# Altium PCB DONGLE01.PcbDoc
Units mil, origin at the board's own origin, x right, y up, seen from the top; angles counter-clockwise.
Board outline 2207 x 654 mil, 2 copper layers (Top, Bottom), stack 41.756 mil thick; 46 components, 31 nets, 144 pads, 90 vias.
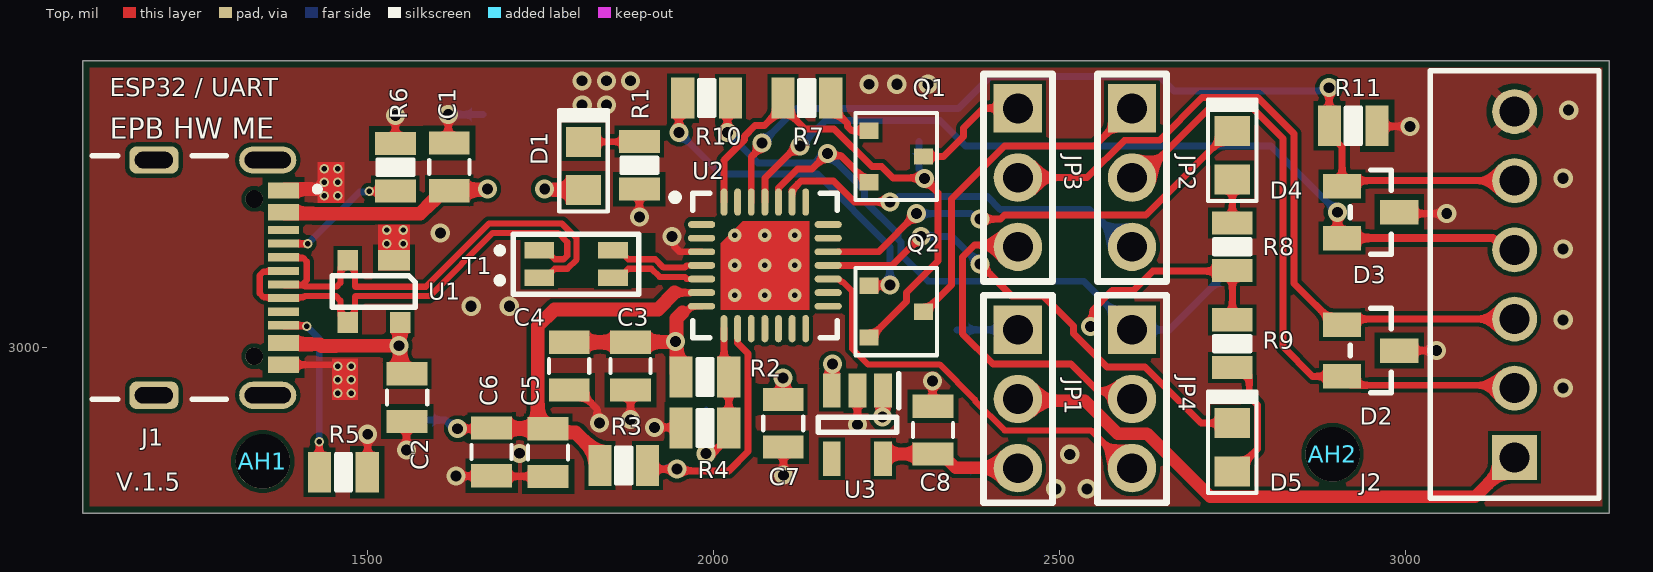
[diagram p0: Top view]
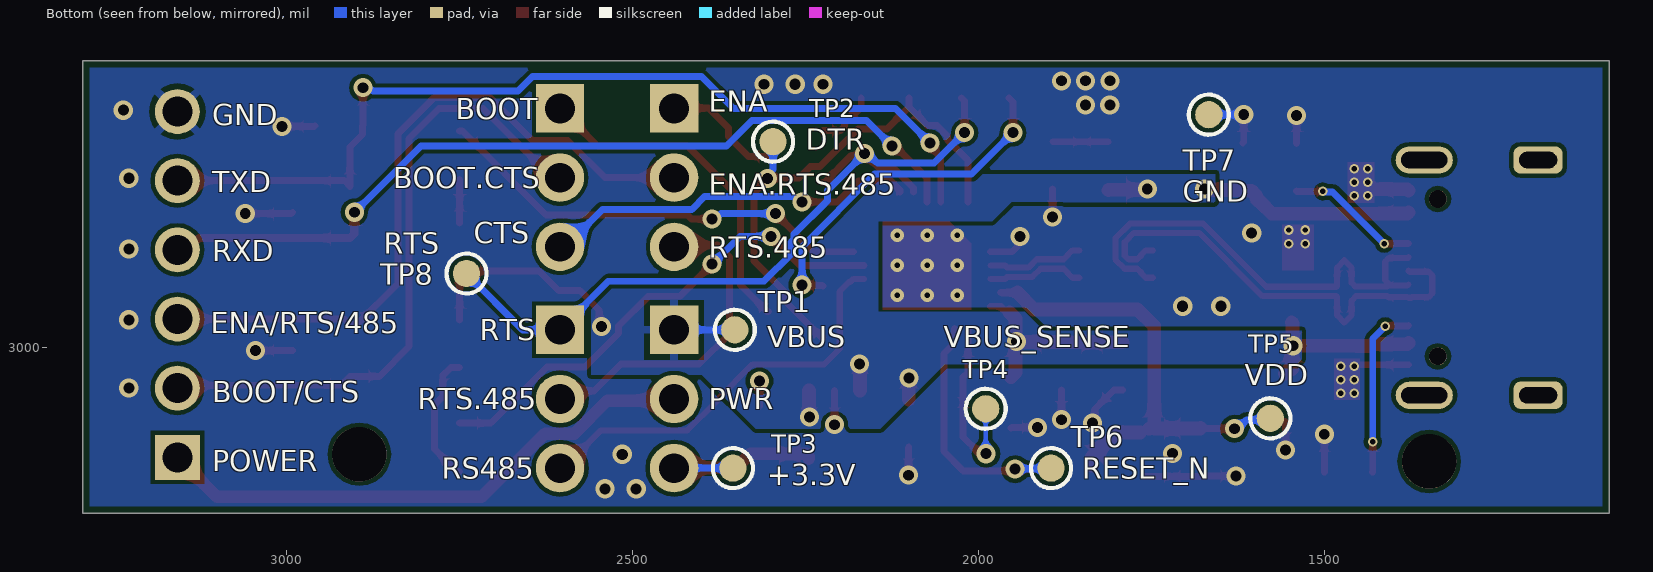
[diagram p1: Bottom view, seen from below]
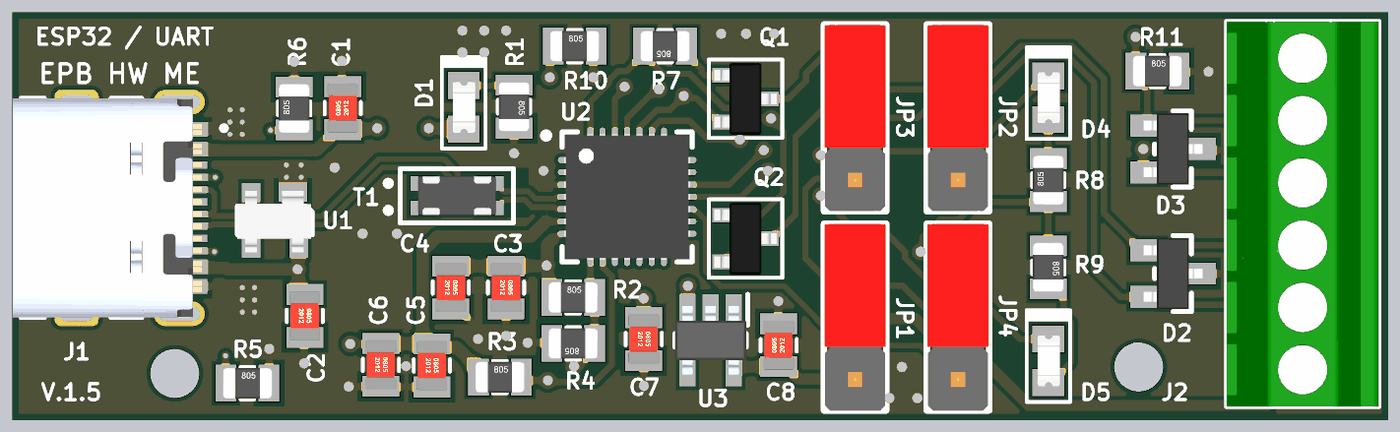
[diagram p2: 3D render of the assembled board from above, using the file's embedded part models]

## Layer stack, top to bottom
Top Solder: solder mask 1, SM-001, Dk 4
Top: signal copper 1.378
Dielectric 1: core 39, Core-042, Dk 4.6
Bottom: signal copper 1.378
Bottom Solder: solder mask 1, SM-001, Dk 4

## Board outline
1088,2760 1088,3414 3295,3414 3295,2760

## Design rules (kind name [scope] priority, off if disabled: settings)
BoardOutlineClearance [All] p1: gap=10 ignorepadtopadclearanceinfootprint=FALSE
Clearance [All vs not InAnyDifferentialPair] p1: gap=6 ignorepadtopadclearanceinfootprint=TRUE
DiffPairsRouting "Schematic Differential Pairs Routing_1" [InNetClass('USB')] p1: maxlimit=4.51 minlimit=4.51 mostfreqgap=4.51 toplayer_minwidth=9 toplayer_maxwidth=9 toplayer_prefwidth=9 bottomlayer_minwidth=9 bottomlayer_maxwidth=9 bottomlayer_prefwidth=9 impedanceprofiledriven=TRUE impedanceprofileid={0D77AD79-8F11-46E1-93D8-ED229D89D16F} impedanceprofilevalue=90.000000 maxuncoupledlength=500
DiffPairsRouting "Schematic Differential Pairs Routing" [InNetClass('USBi')] p2: maxlimit=4.51 minlimit=4.51 mostfreqgap=4.51 toplayer_minwidth=9 toplayer_maxwidth=9 toplayer_prefwidth=9 bottomlayer_minwidth=9 bottomlayer_maxwidth=9 bottomlayer_prefwidth=9 impedanceprofiledriven=TRUE impedanceprofileid={0D77AD79-8F11-46E1-93D8-ED229D89D16F} impedanceprofilevalue=90.000000 maxuncoupledlength=500
DiffPairsRouting [All] p3: maxlimit=4.51 minlimit=4.51 mostfreqgap=4.51 toplayer_minwidth=9 toplayer_maxwidth=9 toplayer_prefwidth=9 bottomlayer_minwidth=9 bottomlayer_maxwidth=9 bottomlayer_prefwidth=9 impedanceprofiledriven=TRUE impedanceprofileid={0D77AD79-8F11-46E1-93D8-ED229D89D16F} impedanceprofilevalue=90.000000 maxuncoupledlength=500
MinimumSolderMaskSliver [not InComponent('J1') and not InComponent('U2')] p1: minsoldermaskwidth=6
PolygonConnect [All] p1: thpad.connectstyle=Relief thpad.reliefconductorwidth=12 thpad.reliefentries=4 thpad.polygonreliefangle="90 Angle" thpad.airgapwidth=8 thpad.conductorbypadedge=TRUE thpad.mindistance=15 thpad.enablemindistance=FALSE smdpad.connectstyle=NoConnect smdpad.reliefconductorwidth=8 smdpad.reliefentries=4 smdpad.polygonreliefangle="90 Angle" smdpad.airgapwidth=8 via.connectstyle=Direct via.reliefconductorwidth=8 via.reliefentries=4 via.polygonreliefangle="90 Angle" via.airgapwidth=8
RoutingVias [All] p1: holewidth=15.75 width=27.56 viastyle="Through Hole" minholewidth=7.87 minwidth=13.78 maxholewidth=39.37 maxwidth=196.85
SMDEntry [All] p1: side=TRUE corner=TRUE anyangle=TRUE
SilkToSolderMaskClearance [IsPad] p1: minsilkscreentomaskgap=1 clearancetoexposedcopper=FALSE
SolderMaskExpansion Via [IsVia] p1: expansion=4 istentingtop=TRUE
SolderMaskExpansion Generic [All] p2: expansion=1 istentingtop=FALSE
SupplyNets "Schematic Supply Nets_3" [InNet('VDD')] p1: voltage=0.000
SupplyNets "Schematic Supply Nets_4" [InNet('+3.3V')] p2: voltage=0.000
SupplyNets "Schematic Supply Nets_2" [InNet('GND')] p3: voltage=0.000
SupplyNets "Schematic Supply Nets_1" [InNet('VBUS')] p4: voltage=0.000
UnRoutedNet [All] p1: checkbadconnections=TRUE
Width [All] p1: maxlimit=50 minlimit=3.94 preferedwidth=10
26 further rules are at their usual default settings.

## Classes and differential pairs
net class USB: DE_N DE_P
net class USBi: DI_N DI_P
differential pair DI: +DI_P -DI_N
differential pair DE: +DE_P -DE_N

## Components (designator, comment, footprint, x,y, rotation, side; value= is the part's Value field where it differs from the comment)
AH1 "Furo de Alinhamento" AH_2.0MMD 1348.43,2834.65 r0 top
AH2 "Furo de Alinhamento" AH_2.0MMD 2895,2845 r0 top
C1 "4,7uF" C0805 1617.94,3260.57 r180 top
C2 "4,7uF" C0805 1557,2927 r0 top
C3 "4,7uF" C0805 1879.92,2972.44 r0 top
C4 "0.1uF" C0805 1791.34,2972.44 r0 top
C5 "4,7uF" C0805 1760.83,2847.44 r0 top
C6 "0.1uF" C0805 1679.13,2848.43 r0 top
C7 "1uF" C0805 2100.79,2889.76 r0 top
C8 "2.2uF" C0805 2317.32,2879.92 r180 top
D1 "Blue Led 0805" "LED 0805" 1812.01,3261.81 r270 top
D2 "7V TVS" WE-TVS_SOT23-3L 2950,2995 r270 top
D3 "7V TVS" WE-TVS_SOT23-3L 2950,3195 r270 top
D4 "RED" "LED 0805" 2750,3277.15 r270 top
D5 "GREEN" "LED 0805" 2750,2855 r270 top
J1 "USB4105-GF-A-060" GCT_USB4105-GF-A-060 1190.94,3100.39 r270 top
J2 "MPT 0,5/ 6-2,54" 1725698 3158.11,2840.55 r90 top
JP1 "Header 3 Pin" JMP-3-PTH-180 2440,2925 r270 top
JP2 "Header 3 Pin" JMP-3-PTH-180 2605,3245 r270 top
JP3 "Header 3 Pin" JMP-3-PTH-180 2440,3245 r270 top
JP4 "Header 3 Pin" JMP-3-PTH-180 2605,2925 r270 top
Q1 "BSS64LT1G" SOT-23 2264.17,3275.59 r270 top
Q2 "BSS64LT1G" SOT-23 2264.17,3051.18 r270 top
R1 "180R" R0805#1 1892.72,3262.8 r0 top
R2 "22K1" R0805#1 1987.6,2956.69 r90 top
R3 "1K07" R0805#1 1870.08,2828.74 r90 top
R4 "47K5" R0805#1 1987.6,2882.87 r270 top
R5 "5K1" R0805#1 1465,2819 r90 top
R6 "5K1" R0805#1 1540,3260 r180 top
R7 "10K" R0805#1 2135,3360 r270 top
R8 "220R" R0805#2 2750,3145 r90 top
R9 "220R" R0805#2 2750,3005 r270 top
R10 "10K" R0805#1 1990,3360 r90 top
R11 "10K" R0805#2 2925,3320 r0 top
T1 "CMC 370MA 2LN 90OHM SMD AEC-Q200" 744232090 1801.18,3120.08 r0 top
TP1 "" TP 2352.24,3025 r180 bottom
TP2 "" TP 2297,3297 r180 bottom
TP3 "" TP 2355,2825 r180 bottom
TP4 "" TP 1989.5,2910.83 r180 bottom
TP5 "" TP 1578,2897 r180 bottom
TP6 "" TP 1895,2825 r180 bottom
TP7 "" TP 1667,3336 r180 bottom
TP8 "" TP 2740.16,3106.3 r180 bottom
U1 "USB ESD protection" SOT143-4 1509.04,3080.46 r270 top
U2 "CP2102N-A02-GQFN28R" "QFN50P500X500X80_HS-29N CP2102N" 2074.21,3118.11 r0 top
U3 "3.3V 600mA PMIC" SOT94P280X100-5N 2208.07,2887.8 r270 top

## Footprints (in the part's own frame and the unit in brackets; to place one, negate y for a bottom-side part, rotate by r counter-clockwise, add the part's x,y. Pads: shape width x height; smd on the part's side, far side on the other; paste and mask are expansions set on the pad)
1725698 [mm]
  rect 1.65x1.65 hole 1.1: 1(0,0)
  round 1.65 hole 1.1: 2(2.54,0) 3(5.08,0) 4(7.62,0) 5(10.16,0) 6(12.7,0)
  silkscreen extent -1.5,-3.1 14.2,3.1, body extent -1.5,-3.1 14.2,3.1, height 8.61
744232090 [mm] "WURTH EMI FILTER 1206"
  rect 1.1x0.6 smd: 1(-1.35,-0.5) 2(1.35,-0.5) 3(1.35,0.5) 4(-1.35,0.5)
  silkscreen extent -2.9,-1.11 2.3,1.1, body extent -1.6,-0.8 1.6,0.8, height 1.15
AH_2.0MMD [mm] "Alignment Hole M2"
  round 2 hole 2 unplated: 1(0,0)
C0805 [mm]
  rect 1.5x0.85 smd mask+0.05: 1(0,0.875) 2(0,-0.875)
  silkscreen extent -0.74,-0.25 0.74,0.25, body extent -0.62,-1 0.63,1, height 0.9
GCT_USB4105-GF-A-060 [mm]
  rect 0.6x1.15 smd: A1_B12(-3.2,4.755) A4_B9(-2.4,4.755) B1_A12(3.2,4.755) B4_A9(2.4,4.755)
  rect 0.3x1.15 smd: A5(-1.25,4.755) A6(-0.25,4.755) A7(0.25,4.755) A8(1.25,4.755) B5(1.75,4.755) B6(0.75,4.755) B7(-0.75,4.755) B8(-1.75,4.755)
  oval 1x2.1 hole 0.6 slot 1.7 at 90 deg: SH1(-4.32,4.18) SH2(4.32,4.18)
  rrect50% 1x1.8 hole 0.6 slot 1.4 at 90 deg: SH3(-4.32,0) SH4(4.32,0)
  round 0.65 hole 0.65 unplated: ""(-2.89,3.68) ""(2.89,3.68)
  silkscreen extent -4.47,-2.26 4.47,6.1, body extent -4.47,-2.6 4.47,5.11, height 3.31
JMP-3-PTH-180 [mil] "Jumper 3 pinos PTH 180º passo 2.54mm"
  rect 70x70 hole 43: 1(-100,0)
  round 70 hole 43: 2(0,0) 3(100,0)
  silkscreen extent -150,-50 150,50, body extent -150,-49 150,49, height 323
"LED 0805" [mm]
  rect 1.1x1.3 smd mask+0.051: A(0.889,0) K(-0.889,0)
  silkscreen extent -2.06,-0.89 1.68,0.89, body extent -1.03,-0.44 1.03,0.47, height 0.85
"QFN50P500X500X80_HS-29N CP2102N" [mm] "QFN, 28-Leads, Body 5,00x5,00mm, Pitch 0,50mm, Thermal Pad 3,25x3,25mm, IPC Medium Density"
  oval 1x0.25 smd: 1(-2.325,1.5) 2(-2.325,1) 3(-2.325,0.5) 4(-2.325,0) 5(-2.325,-0.5) 6(-2.325,-1) 7(-2.325,-1.5) 15(2.325,-1.5) 16(2.325,-1) 17(2.325,-0.5) 18(2.325,0) 19(2.325,0.5) 20(2.325,1) 21(2.325,1.5)
  oval 0.25x1 smd: 8(-1.5,-2.325) 9(-1,-2.325) 10(-0.5,-2.325) 11(0,-2.325) 12(0.5,-2.325) 13(1,-2.325) 14(1.5,-2.325) 22(1.5,2.325) 23(1,2.325) 24(0.5,2.325) 25(0,2.325) 26(-0.5,2.325) 27(-1,2.325) 28(-1.5,2.325)
  round 0.025 smd: 29(0,0)
  Top region: -1.625,-1.625 -1.625,0.813 -0.813,1.625 1.625,1.625 1.625,-1.625
  silkscreen extent -3.42,-2.65 2.65,2.65, body extent -2.55,-2.55 2.55,2.55, height 0.8
R0805#1 [mm]
  rect 1.5x0.85 smd mask+0.05: 1(0,0.875) 2(0,-0.875)
  silkscreen extent -0.66,-0.28 0.66,0.28, body extent -0.62,-1 0.63,1, height 0.78
R0805#2 [mm] "0805 Generic Chip Resistor"
  rect 0.85x1.5 smd mask+0.05: 1(-0.875,0) 2(0.875,0)
  silkscreen extent -0.28,-0.66 0.28,0.66, body extent -1,-0.62 1,0.63, height 0.78
SOT94P280X100-5N [mm]
  rect 1.25x0.65 smd: 1(-1.25,0.94) 2(-1.25,0) 3(-1.25,-0.94) 4(1.25,-0.94) 5(1.25,0.94)
  silkscreen extent -1.88,-1.45 0.28,1.51, body extent -1.4,-1.45 1.4,1.45, height 1
SOT143-4 [mil]
  rect 30x46 smd: 1(-45,29)
  rect 30x30 smd: 2(-45,-38) 3(45,-38) 4(45,38)
  silkscreen extent -23,-60 23,60, body extent -47,-60 51,58, height 41
SOT-23 [mm]
  rect 0.6x0.7 smd: 1(-0.95,-1) 2(0.95,-1) 3(0,1)
  silkscreen extent -1.6,-1.5 1.6,1.5, body extent -1.46,-1.27 1.46,1.27, height 0.95
TP [mm] "Test Point SMD 1mm"
  round 1 smd paste-0.457 mask+0.051: 1(0,0)
  silkscreen extent -0.74,-0.74 0.73,0.74
WE-TVS_SOT23-3L [mm]
  rect 0.9x1.4 smd: 1(-0.95,-1.05) 2(0.95,-1.05) 3(0,1.05)
  silkscreen extent -1.55,-0.75 1.55,0.75, body extent -1.45,-1.2 1.45,1.2, height 1.04

## Part data
AH1 AH2: library part "Aligment Hole M2", RefDes=RefDes
C1 C2 C3 C5: library part CAP, "4.7 µF ±5% 25V Capacitor de cerâmica X7R 0805 (métrico 2012)", Manufacturer=KEMET, Manufacturer P/N=C0805C475J3RACTU, Datasheet=https://www.yageogroup.com/content/datasheet/asset/file/KEM_C1002_X7R_SMD, Info="25V 5% X7R", RefDes=RefDes, Supplier=Digikey, Supplier P/N (CT)=399-C0805C475J3RACTUCT-ND, Supplier P/N (TR)=399-C0805C475J3RACTUTR-ND, Supplier Web Page=https://www.digikey.com.br/pt/products/detail/kemet/C0805C475J3RACTU/12700961
C4 C6: library part CAP, "0.1 µF ±10% 100V Ceramic Capacitor X7R 0805 (2012 Metric)", Manufacturer="Murata Electronics", Manufacturer P/N=GCM21BR72A104KA37L, Datasheet=https://search.murata.co.jp/Ceramy/image/img/A01X/G101/ENG/GCM033R71A103KA03-01A.pdf, Info=MLCC, RefDes=RefDes, Supplier=Digikey, Supplier P/N (Cut Tape)=490-4789-1-ND, Supplier P/N (Tape & Reel)=490-4789-2-ND, Supplier Web Page=https://www.digikey.com/en/products/detail/murata-electronics/GCM21BR72A104KA37L/1641663?s=N4IgTCBcDaICwE4AMBaOB2AHAlA2FAcgCIgC6AvkA
C7: library part CAP, "1 µF ±5% 16V Ceramic Capacitor X7R 0805 (2012 Metric)", Manufacturer=KEMET, Manufacturer P/N=C0805C105J4RAC7800, Datasheet=https://connect.kemet.com:7667/gateway/IntelliData-ComponentDocumentation/1.0/download/datasheet/C0805C105J4RACTU, Info=MLCC, RefDes=RefDes, Supplier=Digikey, Supplier P/N (Cut Tape)=399-C0805C105J4RAC7800CT-ND, Supplier P/N (Tape & Reel)=399-C0805C105J4RAC7800TR-ND, Supplier Web Page=https://www.digikey.com/en/products/detail/kemet/C0805C105J4RAC7800/2211759?s=N4IgTCBcDaIMIAYAcCCscCMaBSAWASgIJwDsKCIAugL5A
C8: library part CAP, "2.2 µF ±5% 16V Ceramic Capacitor X7R 0805 (2012 Metric)", Manufacturer=KEMET, Manufacturer P/N=C0805C225J4REC7800, Datasheet=https://content.kemet.com/datasheets/KEM_C1090_X7R_ESD.pdf, Info=MLCC, RefDes=RefDes, Supplier=Digikey, Supplier P/N (Cut Tape)=399-C0805C225J4REC7800CT-ND, Supplier P/N (Tape & Reel)=399-C0805C225J4REC7800TR-ND, Supplier Web Page=https://www.digikey.com/en/products/detail/kemet/C0805C225J4REC7800/8643702?s=N4IgTCBcDaIMIAYAcCCscxlQKQCwCUBROAdhQRAF0BfIA
D1: library part "LED GREEN 0805", "Blue 470nm LED Indication - Discrete 3.2V 0805 (2012 Metric)", Manufacturer="Würth Elektronik", Manufacturer P/N=150080BS75000, Datasheet=https://www.we-online.com/components/products/datasheet/150080BS75000.pdf, Info="Id = 0.5 Inom (10mA)", RefDes=RefDes, Supplier=Digikey, Supplier P/N (Cut Tape)=732-4982-1-ND, Supplier P/N (Tape & Reel)=732-4982-2-ND, Supplier Web Page=https://www.digikey.com/en/products/detail/w%C3%BCrth-elektronik/150080BS75000/4489912
D2 D3: library part WE-TVS_SOT23-3L_824021, "7V Clamp 15A (8/20µs) Ipp Tvs Diode Surface Mount SOT-23-3", Manufacturer="Würth Elektronik", Manufacturer P/N=824021, Datasheet=https://www.we-online.com/components/products/datasheet/824021.pdf, Info="TVS Diode", RefDes=RefDes, Supplier=Digikey, Supplier P/N (Cut Tape)=732-4468-1-ND, Supplier P/N (Tape & Reel)=732-4468-2-ND, Supplier Web Page=https://www.digikey.com/en/products/detail/w%C3%BCrth-elektronik/824021/3900544
D4: library part "LED RED 0805", "Led Vermelho SMD 0805", RefDes=rRefDes, Supplier=Digikey
D5: library part "LED GREEN 0805", "Led Verde SMD 0805", RefDes=rRefDes, Supplier=Digikey
J1: "USB-C (USB TYPE-C) USB 2.0 Receptacle Connector 24 (16+8 Dummy) Position Surface Mount, Right Angle; Through Hole", Manufacturer="Global Connector Technology", Datasheet=https://www.mouser.com/catalog/specsheets/Global_Connector_Technology_usb4105.pdf, Info="USB4105 - Type C USB 2.0 Connector", Manufacturer P/N=USB4105-GF-A-060, Supplier=Digikey, Supplier P/N (CT)=2073-USB4105-GF-ACT-ND, Supplier P/N (DR)=2073-USB4105-GF-ADKR-ND, Supplier P/N (TR)=2073-USB4105-GF-ATR-ND, Supplier Web=https://www.digikey.com.br/pt/products/detail/gct/USB4105-GF-A/11198441
J2: library part 691322110006, "6 Position Wire to Board Terminal Block Horizontal with Board 0.100\" (2.54mm) Through Hole", Manufacturer="Phoenix Contact", Manufacturer P/N=1725698, Datasheet=https://www.phoenixcontact.com/en-us/products/printed-circuit-board-terminal-mpt-05-6-254-1725698?type=pdf, Info="Borne 6pos 6A e=2,54", RefDes=RefDes, Supplier=Digikey, Supplier P/N (Cut Tape)=277-1277-ND, Supplier P/N (Tape & Reel)=277-1277-ND, Supplier Web Page=https://www.digikey.com/en/products/detail/phoenix-contact/1725698/267466
JP1 JP2 JP3 JP4: library part "Jumper 3", "3 Pin Jumper", Manufacturer="Würth Elektronik", Manufacturer P/N=61300311121, Datasheet=https://www.we-online.com/components/products/datasheet/61300311121.pdf, Info="0.1\" Pin header 1x3", RefDes=RefDes, Supplier=Digikey, Supplier P/N (Cut Tape)=732-5316-ND, Supplier P/N (Tape & Reel)=732-5316-ND, Supplier Web Page=https://www.digikey.com/en/products/detail/w%C3%BCrth-elektronik/61300311121/4846825
Q1 Q2: library part TR-NPN-BC817-SOT23, "Bipolar (BJT) Transistor NPN 80 V 100 mA 60MHz 225 mW Surface Mount SOT-23-3 (TO-236)", Manufacturer=onsemi, Datasheet=https://www.onsemi.com/pdf/datasheet/bss64lt1-d.pdf, Info="VCEsat max 200mV", Manufacturer P/N=BSS64LT1G, RefDes=RefDes, Supplier=Digikey, Supplier P/N (Cut Tape)=BSS64LT1GOSCT-ND, Supplier P/N (Tape & Reel)=BSS64LT1GOSTR-ND, Supplier Web Page=https://www.digikey.com/en/products/detail/onsemi/BSS64LT1G/1476267?s=N4IgTCBcDaIEIGUEDYAsAZAKgRgOIgF0BfIA
R1: library part RESISTOR, "180 Ohms ±1% 0.25W, 1/4W Chip Resistor 0805 (2012 Metric) Anti-Sulfur Thin Film", Manufacturer="Stackpole Electronics Inc", Manufacturer P/N=RNCP0805FTD180R, Datasheet=https://www.seielect.com/catalog/sei-rncp.pdf, Info="1% 100 PPM", RefDes=RefDes, Supplier=Digikey, Supplier P/N (Cut Tape)=RNCP0805FTD180RCT-ND, Supplier P/N (Tape & Reel)=RNCP0805FTD180RTR-ND, Supplier Web Page=https://www.digikey.com/en/products/detail/stackpole-electronics-inc/RNCP0805FTD180R/2240212
R2: library part RESISTOR, Manufacturer="Bourns Inc.", Manufacturer P/N=CR0805-FX-2212ELF, Datasheet=https://bourns.com/docs/product-datasheets/cr.pdf?sfvrsn=574d41f6_14, Info="1% 100 PPM", RefDes=RefDes, Supplier=Digikey, Supplier P/N (Cut Tape)=CR0805-FX-2212ELFCT-ND, Supplier P/N (Tape & Reel)=CR0805-FX-2212ELFTR-ND, Supplier Web Page=https://www.digikey.com/en/products/detail/bourns-inc/CR0805-FX-2212ELF/3784757
R3: library part RESISTOR, "1.07 kOhms ±1% 0.125W, 1/8W Chip Resistor 0805 (2012 Metric) Automotive AEC-Q200 Thick Film", Manufacturer="Vishay Dale", Manufacturer P/N=CRCW08051K07FKEA, Datasheet=https://www.vishay.com/docs/20035/dcrcwe3.pdf, Info="1% 100 PPM", RefDes=RefDes, Supplier=Digikey, Supplier P/N (Cut Tape)=541-1.07KCCT-ND, Supplier P/N (Tape & Reel)=541-1.07KCTR-ND, Supplier Web Page=https://www.digikey.com/en/products/detail/vishay-dale/CRCW08051K07FKEA/1175640
R4: library part RESISTOR, "47.5 kOhms ±1% 0.125W, 1/8W Chip Resistor 0805 (2012 Metric) Moisture Resistant Thick Film", Manufacturer="Bourns Inc.", Manufacturer P/N=CR0805-FX-4752ELF, Datasheet=https://bourns.com/docs/product-datasheets/cr.pdf?sfvrsn=574d41f6_14, Info="1% 100 PPM", RefDes=RefDes, Supplier=Digikey, Supplier P/N (Cut Tape)=118-CR0805-FX-4752ELFCT-ND, Supplier P/N (Tape & Reel)=118-CR0805-FX-4752ELFTR-ND, Supplier Web Page=https://www.digikey.com/en/products/detail/bourns-inc/CR0805-FX-4752ELF/3784977
R5 R6: library part RESISTOR, "5.1 kOhms ±1% 0.125W, 1/8W Chip Resistor 0805 (2012 Metric) Moisture Resistant Thick Film", Manufacturer=YAGEO, Manufacturer P/N=RC0805FR-075K1L, Datasheet=https://www.yageo.com/upload/media/product/products/datasheet/rchip/PYu-RC_Group_51_RoHS_L_12.pdf, Info="1% 100 PPM", RefDes=RefDes, Supplier=Digikey, Supplier P/N (Cut Tape)=311-5.10KCRCT-ND, Supplier P/N (Tape & Reel)=311-5.10KCRTR-ND, Supplier Web Page=https://www.digikey.com/en/products/detail/yageo/RC0805FR-075K1L/727988
R7 R8 R9 R10 R11: library part RESISTOR, "10 kOhms ±1% 0.125W, 1/8W Chip Resistor 0805 (2012 Metric) Automotive AEC-Q200 Thick Film", Manufacturer="Stackpole Electronics Inc", Manufacturer P/N=RMCF0805FT10K0, Datasheet=https://www.seielect.com/catalog/sei-rmcf_rmcp.pdf, Info="1% 100PPM", RefDes=RefDes, Supplier=Digikey, Supplier P/N (Cut Tape)=RMCF0805FT10K0CT-ND, Supplier P/N (Tape & Reel)=RMCF0805FT10K0TR-ND, Supplier Web Page=https://www.digikey.com/en/products/detail/stackpole-electronics-inc/RMCF0805FT10K0/1760676
T1: library part "USB EMI FILTER", "2 Line Common Mode Choke Surface Mount 90 Ohms @ 100 MHz 370mA DCR 300mOhm", Manufacturer="Würth Elektronik", Manufacturer P/N=744232090, Datasheet=https://www.we-online.com/components/products/datasheet/744232090.pdf, Info="EMI Trafo", RefDes=RefDes, Supplier=Digikey, Supplier P/N (Cut Tape)=732-1469-1-ND, Supplier P/N (Tape & Reel)=732-1469-2-ND, Supplier Web Page=https://www.digikey.com/en/products/detail/w%C3%BCrth-elektronik/744232090/1638873?s=N4IgTCBcDaIOwGYwFoCMAWAbATmZ5AcgCIgC6AvkA
TP1 TP2 TP3 TP4 TP5 TP6 TP7 TP8: library part TESTPOINT
  TP1 TP7 TP8: RefDes=rRefDes, Supplier=Digikey
  TP2 TP3 TP4 TP5 TP6: RefDes=RefDes
U1: library part USB2.0_TVS_DIODES, "Clamp Ipp Tvs Diode Surface Mount SOT-143", Manufacturer="Diodes Incorporated", Manufacturer P/N=DRTR5V0U2SR-7, Datasheet=https://www.diodes.com/assets/Datasheets/DRTR5V0U2SR.pdf, Info="ESD Protection Device", RefDes=RefDes, Supplier=Digikey, Supplier P/N (Cut Tape)=DRTR5V0U2SR-7DICT-ND, Supplier P/N (Tape & Reel)=DRTR5V0U2SR-7DITR-ND, Supplier Web Page=https://www.digikey.com/en/products/detail/diodes-incorporated/DRTR5V0U2SR-7/4402528
U2: library part "CP2102N QFN28", "USB Bridge, USB to UART USB 2.0 UART Interface 28-QFN (5x5)", Manufacturer="Silicon Labs", Datasheet=https://www.silabs.com/documents/public/data-sheets/cp2102n-datasheet.pdf, Info=CP2102N-A02-GQFN28R, Manufacturer P/N=CP2102N-A02-GQFN28R, RefDes=RefDes, Supplier=Digikey, Supplier P/N (Cut Tape)=336-5890-1-ND, Supplier P/N (Tape & Reel)=336-5890-2-ND, Supplier Web Page=https://www.digikey.com/en/products/detail/silicon-labs/CP2102N-A02-GQFN28R/9863480
U3: library part RT9080-33GJ5, "Linear Voltage Regulator IC Positive Fixed 1 Output 600mA TSOT-23-5", Manufacturer="Richtek USA Inc.", Datasheet=https://www.richtek.com/assets/product_file/RT9080/DS9080-05.pdf, Info="3.3V 600mA PMIC", Manufacturer P/N=RT9080-33GJ5, RefDes=RefDes, Supplier=Digikey, Supplier P/N (Cut Tape)=1028-1509-1-ND, Supplier P/N (Tape & Reel)=1028-1509-2-ND, Supplier Web Page=https://www.digikey.com/en/products/detail/richtek-usa-inc/RT9080-33GJ5/6161634?s=N4IgTCBcDaIEoBUCcAGAHCgtAZmwcQCkBWEAXQF8g

## Via types
v1: diameter 27.56, hole 15.75, Top to Bottom, tented both sides, 47 vias
v2: diameter 13.78, hole 7.87, Top to Bottom, tented both sides, 20 vias
v3: diameter 28, hole 16, Top to Bottom, tented both sides, 14 vias
v4: diameter 19.68, hole 7.87, Top to Bottom, tented both sides, 9 vias

## Nets (pads, with @x,y where several pads share a name; then routed paths per layer and width w, separated by ;. In a path a pad name is that pad's centre, name@x,y a point inside that pad or via, vN(x,y) a via of type N, cw(c..) or ccw(c..) an arc to the next point about the centre after c; other vN are vias at no path point)
+3.3V: C8.1 JP1.3 TP3.1 U3.5 | length 293.3
  Top w18: U3.5 2245.08,2841.68 2248.87,2845.47 C8.1 2330.12,2845.47 2350.04,2825.55 2439.45,2825.55 JP1.3
  Bottom w10: TP3.1 2399.34,2825 2399.62,2825.28 2439.72,2825.28 JP1.3
BOOT: JP2.1 Q2.3 | length 496
  Top w10: Q2.3 2305.51,3051.18 2344.22,3089.89 2344.22,3214.27 2420.95,3291 2551,3291 JP2.1
BOOT.CTS: D2.2 J2.2 JP2.2 | length 938.4
  Top w10: JP2.2 2616.56,3245 2716.36,3344.8 2780.15,3344.8 2823.12,3301.83 2823.12,3000.58 2866.1,2957.6 D2.2 2921.38,2944.88 3153.78,2944.88 J2.2
CTS: JP2.3 U2.23 | length 545.6
  Top w10: U2.23@2113.66,3224.33 2113.66,3227.32 2126.67,3240.33 2173.3,3240.33 2203.63,3210 v1(2255,3210)
  Bottom w10: v1(2255,3210) 2259.75,3210 2267.45,3217.7 2395.78,3217.7 2414.48,3199 2543.75,3199 2597.75,3145 JP2.3
DE_N: J1.A7 J1.B7 T1.1 U1.2 | length 698.6
  Top w9: J1.A7 1379.56,3089.15 1407.51,3089.15 1409.19,3087.46 1455.27,3087.46 1460.54,3092.73 1460.54,3114.96 U1.2 1481.54,3114.96 1481.54,3088.08 1482.41,3087.21 1583.88,3087.21 1675.25,3178.58 1780.87,3178.58 1801.96,3157.49 1801.96,3126.51 1788.78,3113.33 1770.46,3113.33 1765.19,3108.05 1765.19,3107.7 1757.87,3100.39 T1.1 ; J1.B7 1379.21,3128.86 1406.73,3128.86 1412,3123.59 1412,3096.88 1406.73,3091.61
DE_P: J1.A6 J1.B6 T1.4 U1.3 | length 679.5
  Top w9: J1.B6@1374.99,3070.87 1373.58,3072.27 1349.27,3072.27 1344,3077.54 1344,3103.56 1349.27,3108.83 1376.74,3108.83 J1.A6 ; J1.B6 1379.56,3072.27 1407.51,3072.27 1409.19,3073.96 1453.75,3073.96 1460.54,3067.17 1460.54,3045.96 U1.3 1481.54,3045.96 1481.54,3072.84 1482.41,3073.7 1589.48,3073.7 1680.85,3165.07 1775.28,3165.07 1788.46,3151.89 1788.46,3132.1 1783.19,3126.83 1770.46,3126.83 1765.19,3132.1 1765.19,3132.45 1757.87,3139.76 T1.4
DI_N: T1.2 U2.5 | length 140.1
  Top w9: T1.2 1864.17,3100.39 1871.48,3107.7 1871.48,3108.05 1876.76,3113.33 1910.22,3113.33 1922.03,3101.51 1958.46,3101.51 1961.39,3098.59 1982.52,3098.59 U2.5
DI_P: T1.3 U2.4 | length 140.1
  Top w9: T1.3 1864.17,3139.76 1871.48,3132.45 1871.48,3132.1 1876.76,3126.83 1915.82,3126.83 1927.63,3115.02 1958.46,3115.02 1961.39,3117.95 1982.52,3117.95 U2.4
DTR: Q2.2 R7.2 TP2.1 U2.28 | length 778.1
  Top w10: U2.28 2015.16,3270.11 2044.78,3299.74 2044.78,3304.82 2060.1,3320.15 2073.49,3320.15 R7.2@2100.55,3347.2 ; R7.2 R7.2@2100.55,3347.2 ; Q2.2 2226.77,3013.78 2278.76,3065.77 2278.76,3078.72 2324.78,3124.74 2324.78,3223.08 2305,3242.86 v1(2305,3244) 2304.29,3244.71 2259.43,3244.71 2243.14,3261 2228.88,3261 2174.32,3315.56 2132.2,3315.56 R7.2@2100.55,3347.2
  Bottom w10: TP2.1 2297,3256.75 2305,3248.75 v1(2305,3244)
ENA: JP3.1 Q1.3 | length 172.9
  Top w10: Q1.3 2332.32,3275.59 2361.16,3304.43 2361.16,3316.71 2390,3345.55 2439.45,3345.55 JP3.1
ENA.RTS.485: D2.1 J2.3 JP3.2 | length 1032.2
  Top w10: JP3.2 2539.95,3245 2593.95,3299 2644.56,3299 2706.36,3360.8 2786.77,3360.8 2839.12,3308.45 2839.12,3092.1 2898.82,3032.4 D2.1 2916.81,3040.55 J2.3
GND: C1.2 C2.2 C3.2 C4.2 C5.2 C6.2 C7.2 C8.2 D2.3 D3.3 J1.A1_B12 J1.B1_A12 J2.6 R1.2 R4.2 R5.2 R6.2 R11.2 TP7.1 U1.1 U2.3 U2.29 U3.2 | length 1061.2
  Top w10: J1.B1_A12 1454.72,2974.41 v2(1456.69,2972.44) ; v2@1436.28,3219.23 v2(1437.01,3218.5) ; R5.2 1500,2819.55 v1(1500,2874) ; R6.2 v1(1540,3335) ; v1(1556,2851) 1556,2891.55 C2.2 ; v1(1616.47,3336.28) 1616.47,3296.49 C1.2 ; v1(1627.45,2813.52) 1678.68,2813.52 C6.2 1680.12,2812.99 C5.2 ; C4.2 1804.13,2937.99 1831.64,2910.49 1831.64,2893.36 v1(1835,2890) ; C3.2 1880,2937.91 v1(1880,2895) ; v1(1892.72,3187.99) R1.2 ; v1(1914.51,2883.99) 1952.03,2883.99 R4.2 ; v1(1940,3160) 1943.36,3156.64 1943.36,3145.64 1951.2,3137.8 U2.3 ; C7.2 2101.03,2855.07 v1(2101.03,2814.76) ; v1(2208.07,2887.8) U3.2 ; v1(2316.81,2950.69) 2316.81,2914.88 C8.2 ; R11.2 2960.45,3319 v1(3007,3319) ; D2.3 v1(3045,2995) ; D3.3 2993.34,3193 v1(3060,3193)
  Top w19.68: J1.A1_B12 1380.12,3228.35 1428.73,3228.35 1437.01,3236.62 v2(1437.01,3238.19)
  Bottom w10: v1(1616.47,3336.28) 1616.61,3336.14 1666.86,3336.14 TP7.1
  other v1: 1719.49,2846.46 1845,3350 2225,3380 2310,3380 1810,3385 1845,3385 1880,3385
  other v2: 1456.69,2933.07 1476.38,2933.07 1456.69,2952.76 1476.38,2952.76 1476.38,2972.44 1527.56,3149.61 1551.18,3149.61 1527.56,3169.29 1551.18,3169.29 1456.69,3218.5 1456.69,3238.19 1437.01,3257.87 1456.69,3257.87
  other v3: 2495,2795 2540,2795 2515,2845 3228.35,2940.94 3228.35,3039.37 1649.61,3059.06 1704.72,3059.06 3228.35,3141.73 1605,3165 3228.35,3244.09 3236.22,3342.52 1810,3350 2265,3380
  other v4: 2030.91,3074.8 2074.21,3074.8 2117.52,3074.8 2030.91,3118.11 2074.21,3118.11 2117.52,3118.11 2030.91,3161.42 2074.21,3161.42 2117.52,3161.42
NetD1_K: D1.K R1.1 | length 80.9
  Top w9: D1.K 1892.28,3296.81 R1.1
NetD4_A: D4.A R8.2 | length 62.7
  Top w10: R8.2 D4.A
NetD5_A: D5.A R9.2 | length 190.7
  Top w10: D5.A 2753.94,2820 2786.59,2852.65 2786.59,2916.21 2774.53,2928.27 2774.53,2958.82 2762.8,2970.55 R9.2
NetJ1_A5: J1.A5 R6.1 | length 193.3
  Top w10: J1.A5 v2(1413.39,3149.61) ; v2(1502,3225) 1539.45,3225 R6.1
  Bottom w10: v2(1413.39,3149.61) 1488.06,3224.28 1501.28,3224.28 v2(1502,3225)
NetJ1_B5: J1.B5 R5.1 | length 253.2
  Top w10: J1.B5 1378.92,3030.72 1411.28,3030.72 v2(1412,3030) ; v2(1430,2863) 1430,2819.55 R5.1
  Bottom w10: v2(1412,3030) 1430,3012 v2(1430,2863)
NetQ1_1: Q1.1 R7.1 | length 84.7
  Top w10: R7.1 2169.45,3347.2 2193.66,3322.99 2193.66,3318.85 2199.52,3312.99 Q1.1
NetQ2_1: Q2.1 R10.1 | length 511.4
  Top w10: v1(1950,3310) 1950,3354.45 R10.1 ; Q2.1 2225.51,3089.29 2254.29,3089.29 v1(2255,3090)
  Bottom w10: v1(1950,3310) 2010,3250 2150,3250 2255,3145 v1(2255,3090)
PWR: J2.1 JP1.2 | length 800.5
  Top w18: JP1.2 2442.41,2922.59 2536.69,2922.59 2584.29,2875 2626.54,2875 2718.2,2783.35 3100.91,2783.35 J2.1
RESET_N: R3.2 TP6.1 U2.9 | length 396.6
  Top w10: R3.2 1909.76,2823.51 v1(1947.03,2823.51) 1949.54,2821 2021.99,2821 2049.78,2848.79 2049.78,2990.78 2034.92,3005.64 2034.92,3026.5 U2.9
  Bottom w10: TP6.1 1895.75,2824.25 1946.29,2824.25 v1(1947.03,2823.51)
RS485: JP4.3 U2.17 | length 601.8
  Top w9: U2.17 2180.74,3098.43 2185,3094.16 2186.9,3094.16 2200.52,3080.54 2200.52,2997.62 2223.17,2974.97 2326.87,2974.97 2377.92,2923.92 2377.92,2922.74 2421.15,2879.5 2545.69,2879.5 2600.19,2825 JP4.3
RTS: JP4.1 Q1.2 R10.2 TP8.1 U2.24 | length 1133.5
  Top w10: v1(2020,3310) 2020,3355.55 R10.2 ; U2.24@2093.9,3224.33 2093.9,3230.18 2121.14,3257.43 2142.43,3257.43 v1(2165,3280) 2168.36,3276.64 2184.38,3276.64 2222.83,3238.19 Q1.2
  Bottom w10: v1(2020,3310) 2063.96,3266 2146.25,3266 2160.25,3280 v1(2165,3280) 2218.37,3226.63 2218.37,3211.59 2266.68,3163.28 2266.68,3155.95 2271,3151.63 2271,3134 2309.78,3095.22 2534.78,3095.22 JP4.1 2658.86,3025 TP8.1
RTS.485: JP3.3 JP4.2 | length 482.8
  Top w10: JP3.3 2437.47,3147.53 2377.49,3147.53 2360.22,3130.26 2360.22,3019.22 2404.06,2975.38 2516.99,2975.38 2555.89,2936.48 2593.52,2936.48 JP4.2
RXD: D3.2 J2.4 U2.25 | length 1248.8
  Top w10: U2.25 2074.21,3244.33 2120.66,3290.78 v1(2125,3290.78)
  Top w12: v1(2902.32,3194.91) 2902.32,3163.94 D3.2 3126.73,3157.6 3143.78,3140.55 J2.4
  Bottom w10: v1(2125,3290.78) 2161.91,3327.69 2327.32,3327.69 2364,3291 2806.23,3291 v1(2902.32,3194.91)
RXLED: D5.K U2.18 | length 719.7
  Top w10: U2.18 2258.11,3118.11 v1(2300,3160) ; v1(2385,3120) 2431.51,3073.49 2477.07,3073.49 2520.22,3030.34 2520.22,3019.74 2568.96,2971 2624.05,2971 2705.05,2890 D5.K
  Bottom w10: v1(2300,3160) 2345,3160 v1(2385,3120)
TXD: D3.1 J2.5 R11.1 U2.26 | length 1365.4
  Top w10: U2.26 2054.53,3274.78 2070,3290.25 v1(2070,3295) ; v1(2890,3375) 2890,3320.55 R11.1 2890.55,3307.2 2908.66,3289.09 D3.1 2916.81,3240.55 J2.5
  Bottom w10: v1(2070,3295) 2120,3345 2354.44,3345 2400.44,3391 2644.56,3391 2665.56,3370 2875.36,3370 2877,3371.64 2886.64,3371.64 v1(2890,3375)
TXLED: D4.K U2.19 | length 648.3
  Top w10: U2.19@2180.43,3137.8 2238.35,3137.8 v1(2293.47,3192.92) ; v1(2385,3185) 2414.95,3185 2420.95,3191 2624.91,3191 2746.06,3312.15 D4.K
  Bottom w10: v1(2293.47,3192.92) 2372.33,3192.92 2380.25,3185 v1(2385,3185)
VBUS: C1.1 C2.1 C3.1 C4.1 C7.1 D1.A J1.A4_B9 J1.B4_A9 JP1.1 R2.1 R8.1 R9.1 TP1.1 U1.4 U2.7 U3.1 U3.3 | length 1423.9
  Top w10: 1955,3050 1959.02,3050 1968.07,3059.06 U2.7 ; v1(2545,3030) 2548.36,3033.36 2548.36,3053.92 2576.39,3081.95 2607,3081.95 2635.03,3109.98 2749.43,3109.98 R8.1 R9.1
  Top w19.65: 1508.31,3192.82 1508.48,3192.99 1576.08,3192.99 1585.53,3202.44
  Top w20: J1.B4_A9 1379.96,3004.09 1430.79,3004.09 1433.18,3001.7 1453.79,3001.7 1454.06,3001.97 v1(1545.28,3001.97) ; J1.A4_B9 1379.96,3193.07 1420.13,3193.07 1420.54,3192.66 1508.15,3192.66 1508.31,3192.82 ; U1.4 1546.16,3034.58 1546.16,3002.85 v1(1545.28,3001.97) ; C2.1 1550.27,2968.18 1546.72,2968.18 1546.72,3000.52 v1(1545.28,3001.97) ; 1585.53,3202.44 1598.42,3215.33 1598.42,3219.39 1605.15,3226.12 C1.1 1619.06,3227.23 1672.11,3227.23 v1(1673.23,3228.35) ; v1(1755.91,3228.35) 1756.67,3227.58 1811.24,3227.58 D1.A ; C4.1 C3.1 1880.41,3007.38 1944.39,3007.38 v1(1944.88,3007.87) ; R2.1 1946.42,2963.43 1946.42,3004.29 1944.88,3005.83 v1(1944.88,3007.87) ; 1955,3050 1946.33,3041.33 1946.33,3009.32 v1(1944.88,3007.87) ; v1(2100.66,2955.11) 2100.72,2955.05 2100.72,2924.28 C7.1 ; U3.3 2171.44,2937.38 2171.44,2974.9 v1(2171.81,2975.28) ; v1(2244.48,2899.02) 2244.78,2899.32 2244.78,2936.71 U3.1
  Bottom w10: TP1.1 JP1.1
VBUS_SENSE: R2.2 R4.1 TP4.1 U2.8 | length 267.4
  Top w10: v3(1989,2846) 1992.44,2849.44 2001.41,2849.44 2022.05,2870.08 R4.1 R2.2 2015.16,2963.58 U2.8
  Bottom w6: v3(1989,2846) 1989.5,2846.5 TP4.1
VDD: C5.1 C6.1 R3.1 TP5.1 U2.6 | length 666.2
  Top w10: v1(1630,2882) 1678.26,2882 C6.1 ; 1943.74,3078.74 U2.6@1967.99,3078.74
  Top w20: C6.1 1679.63,2882.38 1745.57,2882.38 C5.1@1746.06,2882.87 ; C5.1@1753.54,2881.89 1752.54,2881.89 1745.81,2888.62 1745.81,3030.25 1770.06,3054.49 1919.49,3054.49 1943.74,3078.74 ; C5.1@1766.16,2876.55 1800.61,2876.55 1835.63,2841.54 R3.1
  Bottom w10: TP5.1 1580.44,2894.56 1612.69,2894.56 1625.25,2882 v1(1630,2882)
pads on no net: AH1.1 AH2.1 J1. J1.A8 J1.B8 J1.SH1 J1.SH2 J1.SH3 J1.SH4 U2.1 U2.2 U2.10 U2.11 U2.12 U2.13 U2.14 U2.15 U2.16 U2.20 U2.21 U2.22 U2.27 U3.4

## Polygon pours and split planes (outlines as drawn)
GND on Bottom "GND_L02_P006" (solid, remove dead copper, pour order 6): 1088,2760 1088,3414 3295,3414 3295,2760
VBUS on Bottom "VBUS_L02_P001" (solid, remove dead copper, pour order 1): 2560,2960 2400,2960 2321.89,2881.89 2141.73,2881.89 2048.62,2975 1540,2975 1532.34,2982.66 1532.34,3023.66 1905.66,3023.66 1933,3051 2145,3051 2145,3182 1979.96,3182 1951.96,3210 1878.06,3210 1877.64,3209.58 1657.48,3208.33 1657.48,3250 2135,3250 2285,3100 2560,3100
GND on Top "GND_L01_P005" (solid, remove dead copper, pour order 5): 1088,2760 1088,3414 3295,3414 3295,2760

## Other copper
Top:
  rectangle net GND: 1515.04,3110.46 1561.04,3177.17
  rectangle net GND: 1448.09,2923.23 1486.22,2983.5
  rectangle net GND: 1427.17,3208.66 1466.54,3267.72
  pour cut-out: 1742.71,3165 1916.6,3165 1916.6,3085.09 1742.71,3085.09

## Silkscreen, mask and mechanical layers (free items; w line width, h text height)
Top Overlay:
  text "ESP32 / UART" at 1127.11,3362.99 h26
  text "EPB HW ME" at 1127.11,3301.55 h30
  text "V.1.5" at 1136.8,2792.12 h26
Bottom Overlay:
  text "GND" at 3108,3320.55 h30
  text "DTR" at 2250,3285 h30
  text "TXD" at 3108,3224 h30
  text "GND" at 1705,3210 h30
  text "RTS" at 2860,3135 h30
  text "RXD" at 3108,3124 h30
  text "ENA/RTS/485" at 3110,3020 h30
  text "VBUS_SENSE" at 2050,3000 h30
  text "VDD" at 1615,2945 h30
  text "BOOT/CTS" at 3108,2920.55 h30
  text "POWER" at 3108,2820.55 h30
  text "RESET_N" at 1850,2810 h30
Board:
  text "Open source hardware." at 1100,3700 h150
  text "Feel free to copy, modify, and redistribute." at 1100,3579.29 h150
  text "Have fun." at 1100,3451.8 h150
  text "V.1.1 = layout improvement only" at 1105,2691.34 h26
  text "V.1.2 = OVERLAY CORRECTIONS" at 1105,2637 h26
  text "V.1.3 = added D2, D3" at 1105,2591.34 h26
  text "V.1.4 = J1, C1 and C2 altered" at 1105,2541.34 h26
  text "V.1.5 = LEDS, PD TXD" at 1105,2491.34 h26

## Text inside footprints (layer, text, board x,y; h text height)
J1: Mechanical 13 "PCB EDGE" at 1092.52,2887.8 h16 r270
JP1: Bottom Overlay "+3.3V" at 2305,2800 h30; Bottom Overlay "PWR" at 2390.13,2910 h30; Bottom Overlay "VBUS" at 2305,3000 h30
JP2: Bottom Overlay "BOOT" at 2755.83,3329.45 h30; Bottom Overlay "CTS" at 2730,3150 h30; Bottom Overlay "BOOT.CTS" at 2845.83,3229.45 h30
JP3: Bottom Overlay "ENA" at 2390,3340 h30; Bottom Overlay "RTS.485" at 2390.13,3129.45 h30; Bottom Overlay "ENA.RTS.485" at 2390,3220 h30
JP4: Bottom Overlay "RTS" at 2720.83,3010 h30; Bottom Overlay "RS485" at 2775.83,2810 h30; Bottom Overlay "RTS.485" at 2810.83,2910 h30